# EAGLE board esp32-wroom-32-breakout_v199 (EAGLE 9.7.0)
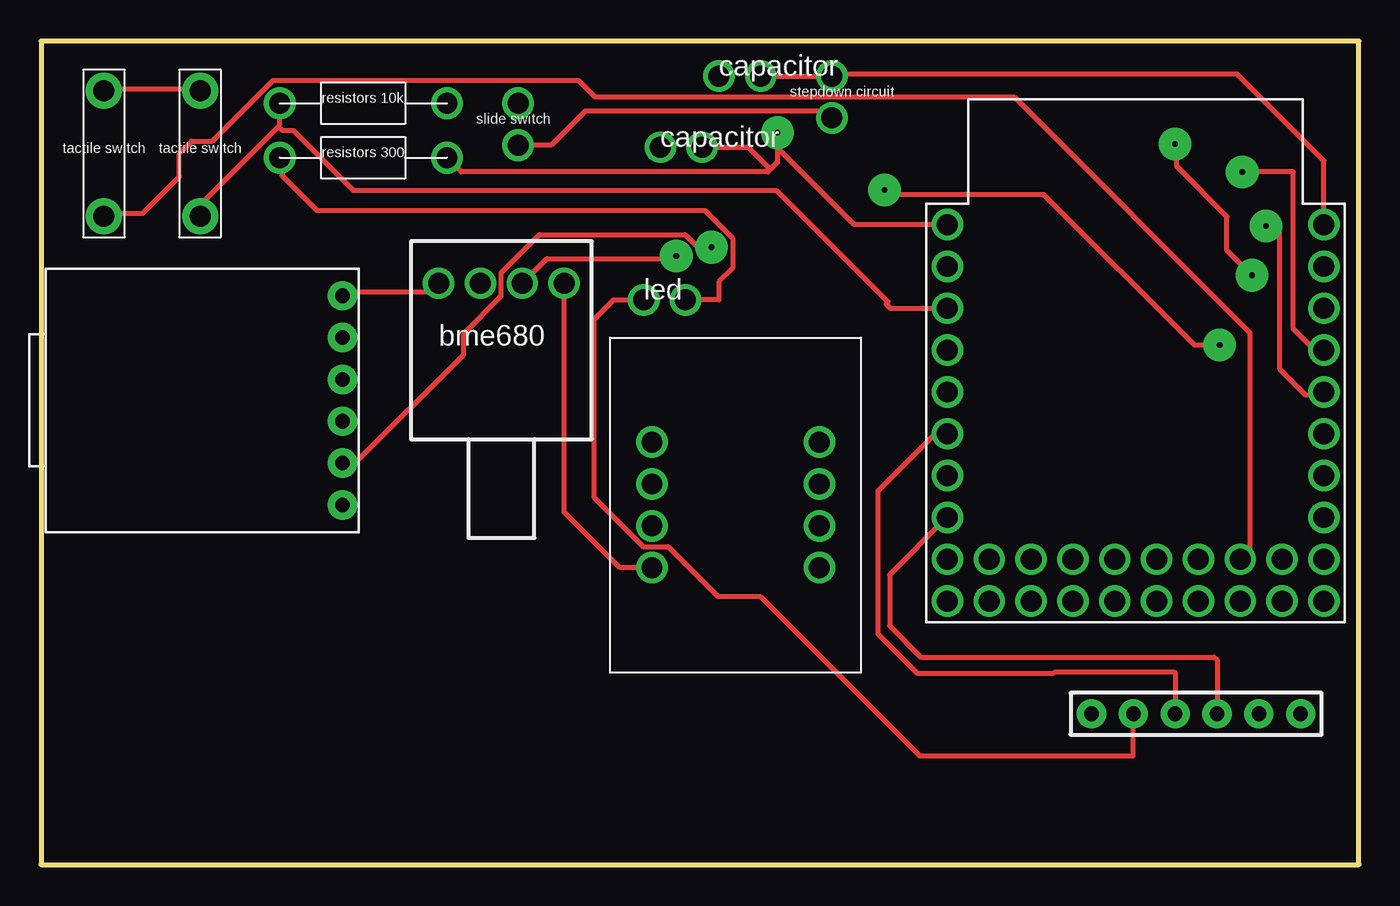
[diagram p0: board, top side]
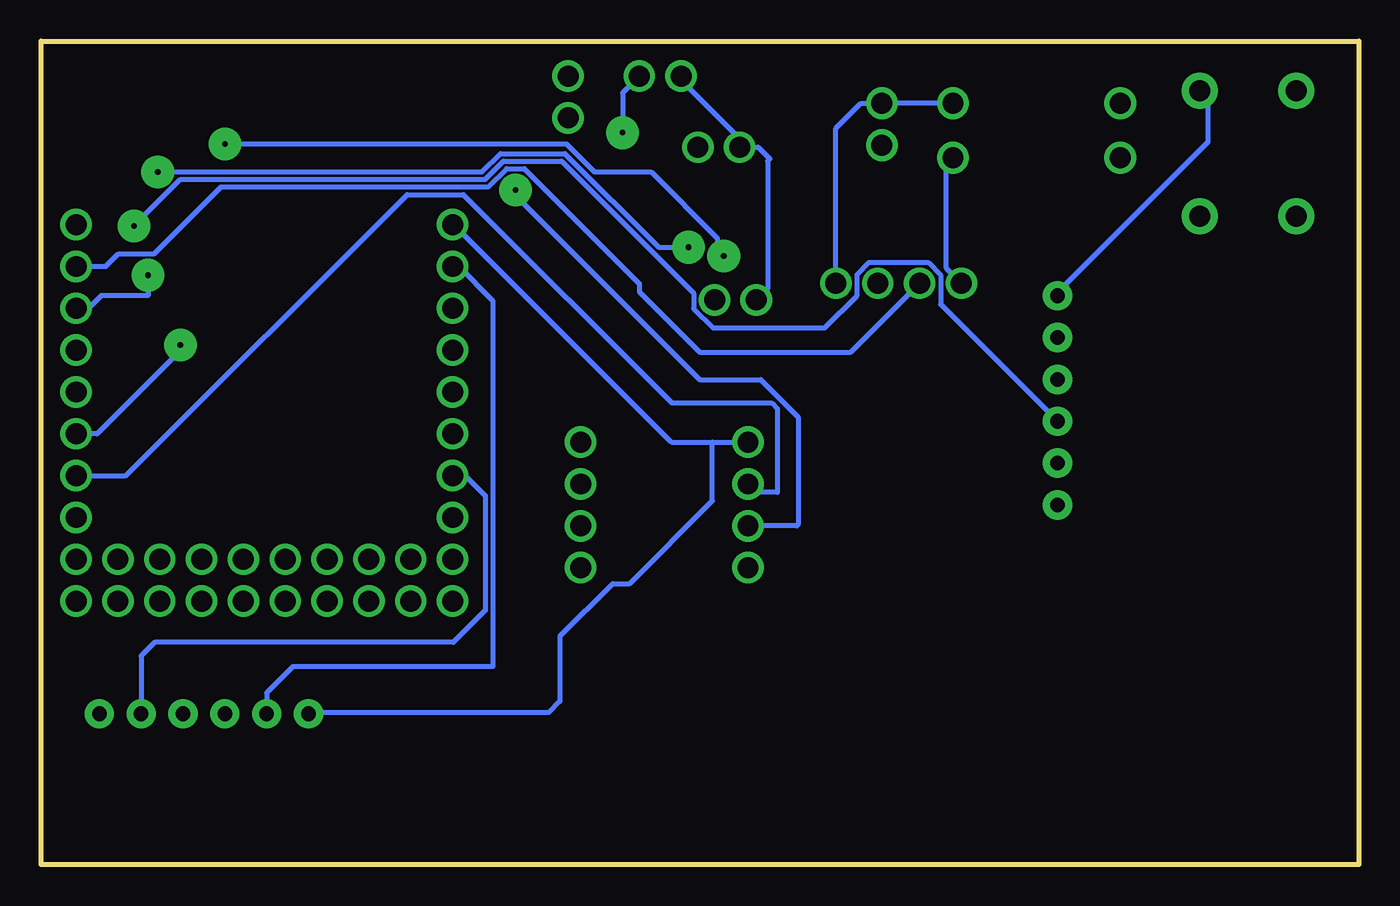
[diagram p1: board, bottom side, seen from below]

Size 80 x 50 mm. Coordinates in mm from the lower left corner, seen from the top.
Outline: 0,0 80,0 80,50 0,50 0,0
Copper layers (1*16): Top 0.035mm / dielectric 1.5mm / Bottom 0.035mm
Design rules "default": minimum track width 6mil, minimum drill 0.35mm, track to track 6mil, track to pad 6mil, pad to pad 6mil, via to via 6mil, smd to smd 6mil, copper to edge 40mil, drill to drill 6mil, minimum pad ring 10mil, minimum via ring 8mil, stop-mask expansion 4mil, vias tented up to drill 0mil, thermal gap 10mil
Net classes: 0 default: width 0.305 mm

## Footprints (pad centres in the part's own frame; a part is rotated, then mirrored left to right if it is on the bottom)
ESP32-PITCH-CONVERSION-BOARD = drill 1.27: 3V3 -11.43,8.89; EN -11.43,6.35; GND1 -11.43,11.43; GND2 11.43,11.43; IO0 6.35,-8.89; IO2 6.35,-11.43; IO4 8.89,-11.43; IO5 11.43,-8.89; IO12 -6.35,-8.89; IO13 -3.81,-11.43; IO14 -6.35,-11.43; IO15 3.81,-8.89; IO16 8.89,-8.89; IO17 11.43,-11.43; IO18 11.43,-6.35; IO19 11.43,-3.81; IO21 11.43,-1.27; IO22 11.43,6.35; IO23 11.43,8.89; IO25 -11.43,-8.89; IO26 -8.89,-11.43; IO27 -8.89,-8.89; IO32 -11.43,-6.35; IO33 -11.43,-11.43; IO34 -11.43,-1.27; IO35 -11.43,-3.81; RXD 11.43,1.27; SCK 1.27,-11.43; SCS -1.27,-8.89; SD0 1.27,-8.89; SDI 3.81,-11.43; SHD -3.81,-8.89; SVN -11.43,1.27; SVP -11.43,3.81; SWP -1.27,-11.43; TXD 11.43,3.81
HEARTRATEMONITOR = drill 1.27: GND -5.08,3.81; NULL1 5.08,1.27; NULL2 5.08,-1.27; NULL3 5.08,-3.81; NULL4 5.08,3.81; SCL -5.08,1.27; SDA -5.08,-1.27; VIN -5.08,-3.81
SWITCH-ROUND-PADS = drill 1.27 pad 1.93: P$1 0,1.27; P$2 0,-1.27
SWITCH-300MIL-0.3INCHES-7.62MM = drill 1.27 pad 2.184: P$1 0,3.81; P$2 0,-3.81
TYPE-C = drill 0.889 pad 1.778: GND 0,6.35; P$2 0,3.81; P$3 0,1.27; P$6 0,-6.35; RXD 0,-3.81; TXD 0,-1.27
ENVIRONMENT-SENSOR = drill 1.27: GND -3.81,3.81; SCL 1.27,3.81; SDA -1.27,3.81; VIN 3.81,3.81
STEPDOWN-CIRCUIT = drill 1.27: GND 0,1.27; V+ 0,-1.27
ACCELERATOR = drill 0.889 pad 1.778: 3.3V 0,3.81; GND 0,6.35; ST 0,-6.35; X 0,1.27; Y 0,-1.27; Z 0,-3.81
LEDLIGHT = drill 1.27 pad 1.93: GND 1.27,0; VCC -1.27,0
CAPACITORS = drill 1.27: GND 1.27,0; VCC -1.27,0
RESISTORS10K = drill 1.27 pad 1.93: P$1 -5.08,0; P$2 5.08,0
RESISTORS300 = drill 1.27 pad 1.93: P$1 -5.08,0; P$2 5.08,0

## Placement (x,y rotation side)
U$1  ESP32-PITCH-CONVERSION  [ESP32-PITCH-CONVERSION-BOARD]  66.45,27.43 0 top
U$2  HEARTRATEMONITOR  [HEARTRATEMONITOR]  42.16,21.84 0 top
U$3  SWITCHROUNDEDPADS  [SWITCH-ROUND-PADS]  28.96,44.96 0 top
U$4  SWITCH-3MIL-0.3INCHES-7.62MM  [SWITCH-300MIL-0.3INCHES-7.62MM]  9.65,43.18 0 top
U$5  SWITCH-3MIL-0.3INCHES-7.62MM  [SWITCH-300MIL-0.3INCHES-7.62MM]  3.81,43.18 0 top
U$6  TYPE-C  [TYPE-C]  18.29,28.19 0 top
U$7  ENVIRONMENT-SENSOR  [ENVIRONMENT-SENSOR]  27.94,31.5 0 top
U$8  STEPDOWN-CIRCUIT  [STEPDOWN-CIRCUIT]  48.01,46.61 0 top
U$9  ACCELERATOR  [ACCELERATOR]  70.12,9.17 90 top
U$10  LEDLIGHTLED  [LEDLIGHT]  37.85,34.29 0 top
U$11  CAPACITOR  [CAPACITORS]  42.42,47.88 0 top
U$12  CAPACITOR  [CAPACITORS]  38.86,43.56 0 top
U$13  RESISTOR10K  [RESISTORS10K]  19.56,46.23 0 top
U$14  RESISTOR300  [RESISTORS300]  19.56,42.93 0 top

## Library data of the parts
U$1-U$14 = esp32-component-libraries

## Nets
+V: U$2.VIN U$3.P$1 U$7.VIN U$13.P$2
GND: U$1.GND1 U$1.GND2 U$2.GND U$4.P$1 U$5.P$1 U$6.GND U$7.GND U$8.GND U$9.GND U$11.GND U$12.GND U$14.P$2
N$1: U$1.EN U$4.P$2 U$13.P$1
N$2: U$10.GND U$14.P$1
N$3: U$1.IO0 U$5.P$2
N$4: U$1.IO23 U$7.SDA
N$5: U$1.IO34 U$9.X
N$6: U$1.3V3 U$9.3.3V U$10.VCC U$11.VCC U$12.VCC
N$7: U$1.IO35 U$9.Z
N$8: U$1.IO32 U$9.Y
N$9: U$1.IO21 U$2.SDA
N$10: U$3.P$2 U$8.V+
N$11: U$1.TXD U$6.RXD
N$12: U$1.RXD U$6.TXD
N$13: U$1.IO22 U$7.SCL
N$14: U$1.IO19 U$2.SCL

## Tracks (layer width: path | path; a pad name or v marks a point on that pad's centre or on a via)
+V
  Top 0.305: U$7.VIN 31.75,21.41 35.13,18.03 U$2.VIN
  Bottom 0.305: U$7.VIN 31.75,44.7 30.23,46.23 U$3.P$1 U$13.P$2
GND  (via drill 0.35 pad 2)
  Top 0.305: U$5.P$1 3.89,47.09 9.14,47.09 9.25,46.99 U$4.P$1 | U$6.GND 18.29,34.75 23.57,34.75 U$7.GND | 44.27,42.22 44.12,42.06 25.5,42.06 U$14.P$2 | U$1.GND1 49.38,38.86 44.7,43.54 v44.7,44.45 44.7,42.65 44.27,42.22 | U$1.GND2 77.88,42.75 72.62,48.01 48.13,48.01 U$8.GND U$11.GND | U$12.GND 42.93,43.56 44.27,42.22
  Bottom 0.305: U$6.GND 18.29,34.75 9.14,43.89 9.14,46.48 U$4.P$1 | U$9.GND 63.67,9.27 49.15,9.27 48.5,9.92 48.5,13.86 45.29,17.07 44.27,17.07 39.26,22.09 39.26,25.65 | U$1.GND1 54.94,38.86 41.73,25.65 39.26,25.65 | U$7.GND 25.04,36.22 25.04,42.52 U$14.P$2 | U$11.GND 44.7,46.86 v44.7,44.45 | 39.26,25.65 U$2.GND
N$1
  Top 0.305: U$1.EN 51.56,33.78 51.31,34.04 51.42,34.15 44.63,40.95 18.94,40.95 15.31,44.58 14.63,44.58 14.4,44.81 | 14.4,44.81 9.65,40.06 U$4.P$2 | 14.4,44.81 14.48,44.88 U$13.P$1
N$2
  Top 0.305: U$10.GND 41.15,34.29 41.15,35.38 41.99,36.22 41.99,38.03 40.29,39.73 16.74,39.73 14.63,41.83 14.63,42.77 U$14.P$1
N$3
  Top 0.305: U$5.P$2 3.89,39.55 6.17,39.55 8.39,41.77 8.39,43.19 9.13,43.93 10.38,43.93 14.08,47.62 32.61,47.62 33.62,46.62 59.07,46.62 73.38,32.31 73.38,19.13 U$1.IO0
N$4
  Bottom 0.305: U$1.IO23 76.08,36.32 75.31,37.08 73.14,37.08 69.07,41.15 52.86,41.15 51.74,42.27 50.67,42.27 43.69,35.28 43.69,34.78 40.02,31.11 30.86,31.11 U$7.SDA
N$5
  Top 0.305: U$9.X 68.85,11.67 68.83,11.68 61.52,11.68 61.47,11.63 53.19,11.63 50.8,14.02 50.8,22.68 54.41,26.29 54.53,26.16 U$1.IO34
N$6
  Top 0.305: U$9.3.3V 66.29,9.15 66.29,6.6 53.34,6.6 43.65,16.3 41.08,16.3 38.06,19.32 36.56,19.32 33.56,22.32 33.56,33.09 34.76,34.29 U$10.VCC
  Bottom 0.305: U$9.3.3V 66.31,10.44 64.72,12.03 52.58,12.03 52.58,34.24 54.66,36.32 U$1.3V3 | U$11.VCC 41.15,47.62 37.59,44.07 U$12.VCC 36.47,43.56 35.76,42.85 35.89,42.72 35.89,34.98 U$10.VCC
N$7
  Bottom 0.305: U$9.Z 73.93,12.69 73.11,13.5 54.98,13.5 53.03,15.45 53.03,22.4 54.25,23.62 U$1.IO35
N$8
  Top 0.305: U$9.Y 71.39,12.43 71.22,12.6 53.42,12.6 51.51,14.5 51.51,17.6 54.99,21.08 U$1.IO32
N$9  (via drill 0.35 pad 1.98)
  Top 0.305: v71.55,31.55 70.03,31.55 60.88,40.69 51.49,40.69 v51.21,40.97
  Bottom 0.305: v71.55,31.55 71.55,31.22 76.61,26.16 U$1.IO21 | U$2.SDA 34.12,20.57 34.04,20.66 34.04,27.18 36.31,29.45 40.02,29.45 51.21,40.64 v51.21,40.97
N$10
  Top 0.305: U$8.V+ 47.59,45.76 33.03,45.76 30.96,43.69 U$3.P$2
N$11  (via drill 0.35 pad 1.98)
  Top 0.305: U$6.RXD 19.05,24.38 25.64,30.98 25.64,32.24 27.93,34.53 27.93,35.93 30.25,38.25 39.1,38.25 39.86,37.49 v40.69,37.49 | v72.92,42.06 76.02,42.06 76.02,32.54 77.32,31.24 U$1.TXD
  Bottom 0.305: v40.69,37.49 42.52,37.49 48.21,43.18 52.12,43.18 53.24,42.06 v72.92,42.06
N$12  (via drill 0.35 pad 1.98)
  Top 0.305: v74.37,38.78 75.21,38.78 75.21,30.07 76.76,28.52 77.7,28.52 U$1.RXD
  Bottom 0.305: v74.37,38.78 71.55,41.6 53.05,41.6 51.93,42.72 48.4,42.72 40.39,34.71 40.39,33.76 39.21,32.59 32.44,32.59 30.47,34.56 30.47,35.83 29.73,36.56 26.15,36.56 25.39,35.8 25.39,34.02 U$6.TXD
N$13  (via drill 0.35 pad 1.98)
  Top 0.305: v68.83,43.76 68.94,43.76 68.94,42.39 71.98,39.34 71.98,37.31 v73.51,35.79 | v38.56,36.96 38.41,36.8 30.71,36.8 U$7.SCL
  Bottom 0.305: v68.83,43.76 48.11,43.76 46.41,42.06 42.97,42.06 38.94,38.03 38.94,37.34 v38.56,36.96 | v73.51,35.79 73.51,34.54 76.36,34.54 77.12,33.78 U$1.IO22
N$14
  Bottom 0.305: U$1.IO19 74.85,23.62 57.78,40.69 54.36,40.69 41.7,28.03 35.65,28.03 35.31,27.69 35.31,22.61 36.58,22.61 U$2.SCL